# EAGLE board ELEKTRA-PMIC v0.2-35X22.86-0.8 (EAGLE 9.6.2)
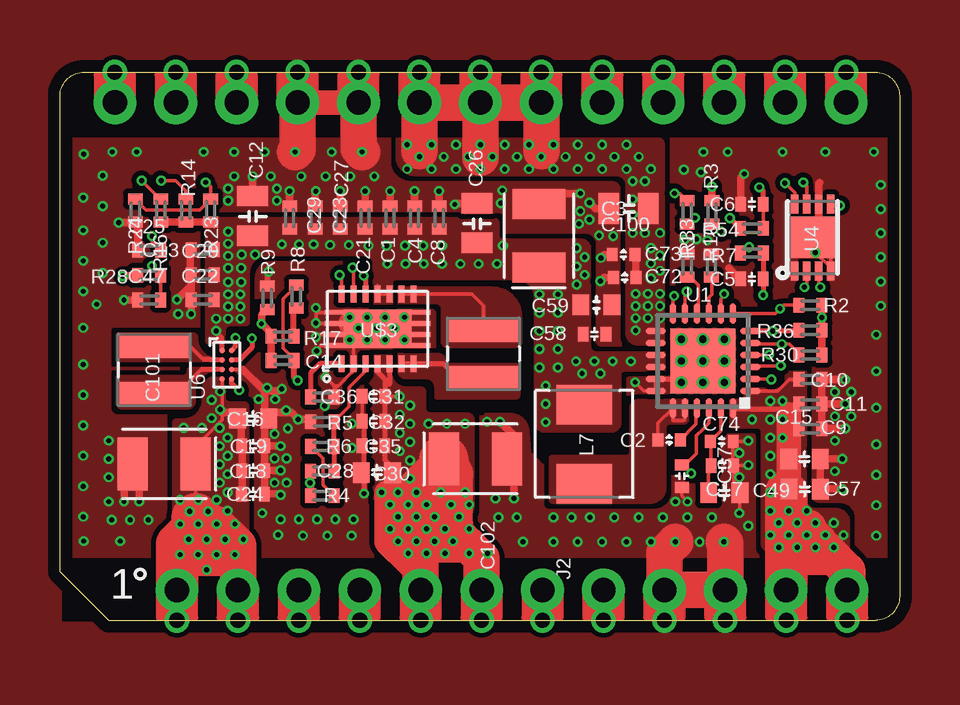
[diagram p0: board, top side]
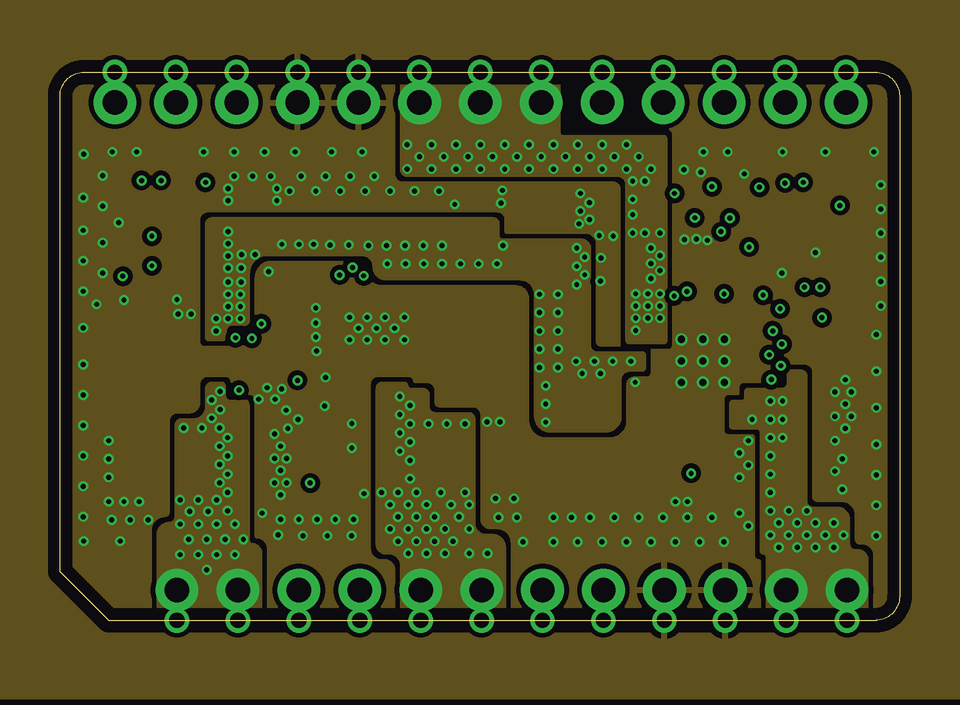
[diagram p1: board, inner layer Route2]
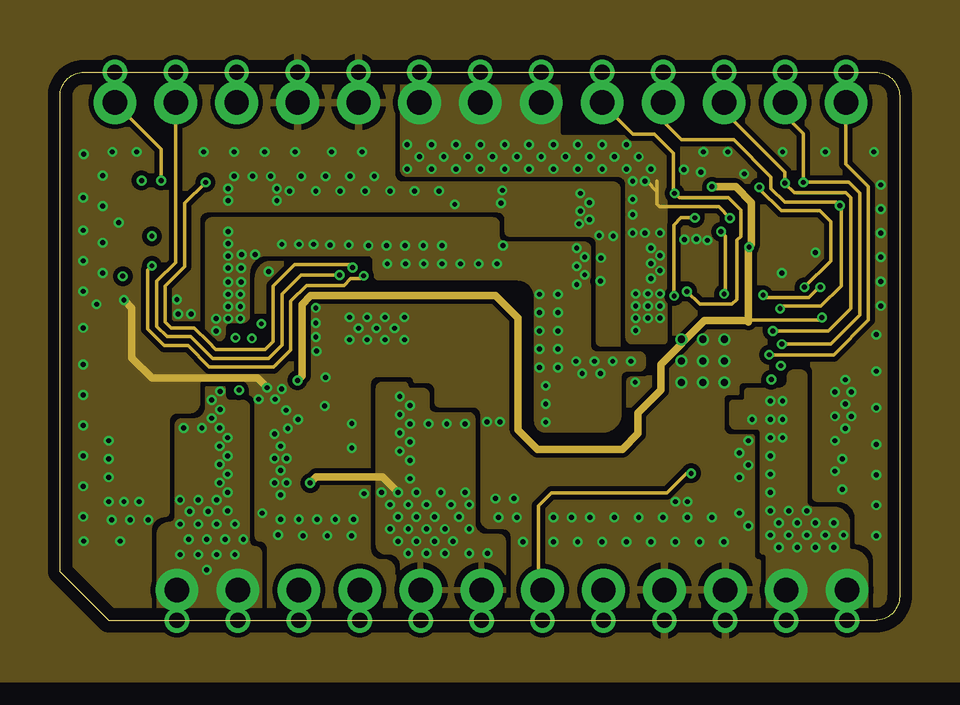
[diagram p2: board, inner layer Route15]
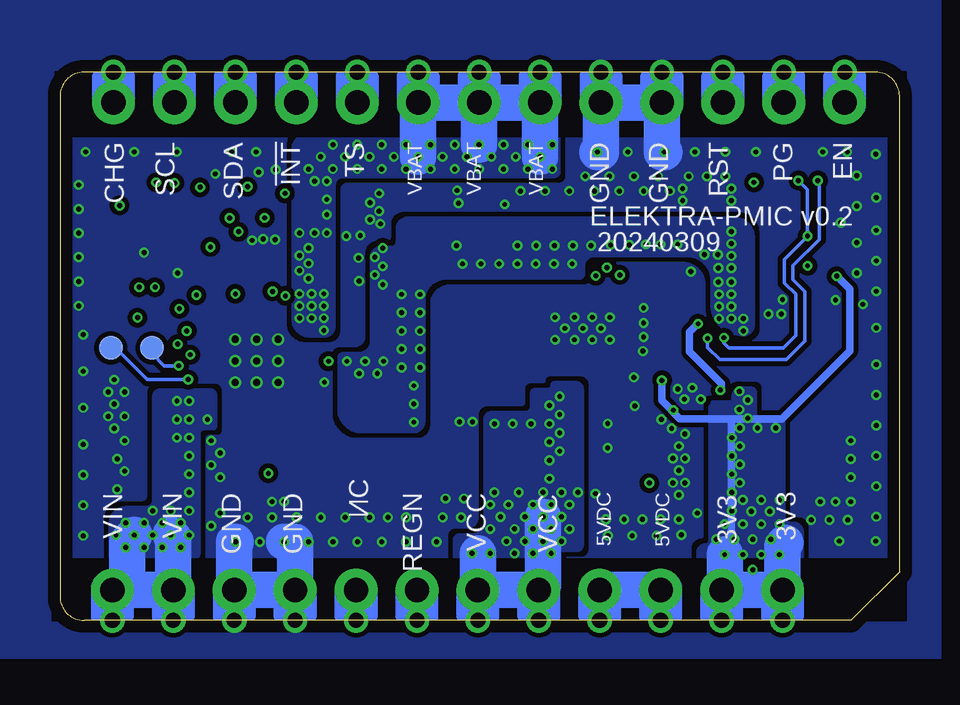
[diagram p3: board, bottom side, seen from below]

Size 35 x 22.86 mm. Coordinates in mm from the lower left corner, seen from the top.
Outline: 2.03,0 34,0 arc90 35,1 35,21.86 arc90 34,22.86 1,22.86 arc90 0,21.86 0,2.03 2.03,0
Copper layers (1+2*15+16): Top 0.035mm / dielectric 1.5mm / Route2 0.035mm / dielectric 0.15mm / Route15 0.035mm / dielectric 0.2mm / Bottom 0.035mm
Design rules "default *": minimum track width 4mil, minimum drill 8mil, track to track 8mil, track to pad 6mil, pad to pad 6mil, via to via 6mil, smd to smd 6mil, copper to edge 20mil, drill to drill 6mil, minimum pad ring 4mil, minimum via ring 4mil, stop-mask expansion 4mil, vias tented up to drill 16mil, thermal gap 10mil
Net classes: 0 default: width 0.152 mm, drill 0.203 mm, clearance 0.152 mm; 1 power: width 0.305 mm, drill 0.203 mm, clearance 0.203 mm; 3 BAT: drill 0.203 mm, clearance 0.203 mm; 4 3V3: width 0.305 mm, drill 0.203 mm, clearance 0.508 mm; 6 +3V3: width 0.203 mm, drill 0.203 mm, clearance 0.152 mm

## Footprints (pad centres in the part's own frame; a part is rotated, then mirrored left to right if it is on the bottom)
C0402_B = smd 0.457 x 0.61: 1 -0.483,0; 2 0.483,0
C-0402 = smd 0.45 x 0.55: 1 -0.47,0; 2 0.47,0
C0805 = smd 0.85 x 1.3: 1 -0.8,0; 2 0.85,0
C0402 = smd 0.45 x 0.6: 1 -0.47,0; 2 0.47,0
C-0603A = smd 0.7 x 0.85: 1 -0.65,0; 2 0.65,0
C0603 = smd 0.7 x 0.85: 1 -0.65,0; 2 0.65,0
CASE-B = smd 2.2 x 1.25: P$1 0,-1.32; P$2 0,1.32
1X13-CASTELLATED = drill 1.016 pad 1.778: 1 0,-15.24; 2 0,-12.7; 3 0,-10.16; 4 0,-7.62; 5 0,-5.08; 6 0,-2.54; 7 0,0; 8 0,2.54; 9 0,5.08; 10 0,7.62; 11 0,10.16; 12 0,12.7; 13 0,15.24 | drill 0.635 pad 1.016: @1 1.27,-15.24; @2 1.27,-12.7; @3 1.27,-10.16; @4 1.27,-7.62; @5 1.27,-5.08; @6 1.27,-2.54; @7 1.27,0; @8 1.27,2.54; @9 1.27,5.08; @10 1.27,7.62; @11 1.27,10.16; @12 1.27,12.7; @13 1.27,15.24
1X12-CASTELLATED = drill 1.016 pad 1.778: 1 0,-13.97; 2 0,-11.43; 3 0,-8.89; 4 0,-6.35; 5 0,-3.81; 6 0,-1.27; 7 0,1.27; 8 0,3.81; 9 0,6.35; 10 0,8.89; 11 0,11.43; 12 0,13.97 | drill 0.635 pad 1.016: @1 1.27,-13.97; @2 1.27,-11.43; @3 1.27,-8.89; @4 1.27,-6.35; @5 1.27,-3.81; @6 1.27,-1.27; @7 1.27,1.27; @8 1.27,3.81; @9 1.27,6.35; @10 1.27,8.89; @11 1.27,11.43; @12 1.27,13.97
INDUCTOR-VLS-E = smd 1 x 3: P$1 -1,0; P$2 1,0
INDUCTOR-4040 = smd 1.65 x 2.3: P$1 -1.65,0; P$2 1.65,0
R0402_B = smd 0.457 x 0.61: 1 -0.483,0; 2 0.483,0
TP = smd 1 x 1: P$1 0,0
TP0.4MM = smd 0.4 x 0.4: P$1 0,0
QFN24 = smd 0.85 x 0.28: 1 -1.975,1.25; 2 -1.975,0.75; 3 -1.975,0.25; 4 -1.975,-0.25; 5 -1.975,-0.75; 6 -1.975,-1.25; 13 1.975,-1.25; 14 1.975,-0.75; 15 1.975,-0.25; 16 1.975,0.25; 17 1.975,0.75; 18 1.975,1.25 | smd 0.28 x 0.85: 7 -1.25,-1.975; 8 -0.75,-1.975; 9 -0.25,-1.975; 10 0.25,-1.975; 11 0.75,-1.975; 12 1.25,-1.975; 19 1.25,1.975; 20 0.75,1.975; 21 0.25,1.975; 22 -0.25,1.975; 23 -0.75,1.975; 24 -1.25,1.975 | smd 2.7 x 2.7: PAD 0,0 | drill 0.3 pad 0.406: PAD@1 -0.9,0.9; PAD@2 0,0.9; PAD@3 0.9,0.9; PAD@4 -0.9,0; PAD@5 0,0; PAD@6 0.9,0; PAD@7 -0.9,-0.9; PAD@8 0,-0.9; PAD@9 0.9,-0.9
TDFN-8 = smd 0.8 x 0.3: 1 -1.4,0.75; 2 -1.4,0.25; 3 -1.4,-0.25; 4 -1.4,-0.75; 5 1.4,-0.75; 6 1.4,-0.25; 7 1.4,0.25; 8 1.4,0.75 | smd 1.73 x 1.88: EP 0,0
DSBGA = smd 0.23 x 0.23: A1 -0.2,0.6; A2 0.2,0.6; B1 -0.2,0.2; B2 0.2,0.2; C1 -0.2,-0.2; C2 0.2,-0.2; D1 -0.2,-0.6; D2 0.2,-0.6
TPS63020 = smd 0.25 x 0.7: 1 -1.5,-1.45; 2 -1,-1.45; 3 -0.5,-1.45; 4 0,-1.45; 5 0.5,-1.45; 6 1,-1.45; 7 1.5,-1.45; 8 1.5,1.45; 9 1,1.45; 10 0.5,1.45; 11 0,1.45; 12 -0.5,1.45; 13 -1,1.45; 14 -1.5,1.45 | smd 1.1 x 0.2: 15 -1.65,0.69; 16 -1.65,0.23; 17 -1.65,-0.23; 18 -1.65,-0.69; 19 1.65,-0.69; 20 1.65,-0.23; 21 1.65,0.23; 22 1.65,0.69 | smd 2.85 x 1.58: 23 0,0

## Placement (x,y rotation side)
C1  100pF  [C0402_B]  13.76,16.79 270 top
C2  47nF  [C-0402]  25.4,7.52 180 top
C3  10uF  [C0805]  23.72,17.17 180 top
C4  1000pF  [C0402_B]  14.79,16.79 270 top
C5  10nF  [C0402]  28.85,14.24 180 top
C6  1uF  [C0402]  28.85,17.36 180 top
C8  0.1nF  [C0402_B]  15.81,16.79 270 top
C9  0.1uF  [C0402_B]  31.28,7.99 180 top
C10  100pF  [C0402_B]  31.28,10.05 180 top
C11  1000pF  [C0402_B]  31.28,9.03 180 top
C12  22uF 10V  [C0805]  8.04,16.84 90 top
C13  100nF  [C0402_B]  5.94,15.45 0 top
C14  NC  [C0402_B]  9.29,10.84 0 top
C15  2.2uF,25V  [C-0603A]  31.04,6.73 0 top
C16  22uF  [C-0603A]  8.06,8.42 0 top
C17  0.1uF  [C0402]  27.61,6.46 180 top
C18  100pF  [C0402]  8.06,6.25 0 top
C19  1nF  [C0402]  8.06,7.28 0 top
C20  1000pF  [C0402_B]  5.94,14.41 0 top
C21  10pF  [C0402_B]  12.72,16.79 270 top
C22  10pF  [C0402_B]  5.94,13.37 0 top
C23  1000pF  [C0402_B]  10.64,16.79 270 top
C24  0.1uF  [C0402]  8.05,5.27 0 top
C25  10nF  [C0402_B]  3.72,15.44 0 top
C26  22uF 10V  [C0805]  17.38,16.54 90 top
C27  100nF  [C0402_B]  11.68,16.79 270 top
C28  NC  [C0402_B]  10.94,6.23 180 top
C29  10pF  [C0402_B]  9.58,16.79 270 top
C30  22uF  [C-0603A]  13.21,6.17 180 top
C31  1nF  [C0402]  13.07,9.34 180 top
C32  100pF  [C0402]  13.07,8.31 180 top
C35  0.1uF  [C0402]  13.07,7.28 180 top
C36  100nF  [C0402_B]  10.94,9.32 180 top
C37  4.7uF  [C0402]  25.93,6.02 270 top
C47  100nF  [C0402_B]  3.71,13.36 0 top
C49  10uF,25V  [C-0603A]  27.69,5.32 0 top
C57  10uF  [C-0603A]  31.04,5.47 0 top
C58  0.1uF  [C0402]  22.29,11.93 0 top
C59  22uF  [C0603]  22.36,13.15 0 top
C72  0.1uF  [C-0402]  23.54,14.3 180 top
C73  1000pF  [C-0402]  23.49,15.26 180 top
C74  1000p  [C-0402]  27.59,7.47 180 top
C100  220uF,10V  [CASE-B]  19.96,16.03 0 top
C101  220uF.6V  [CASE-B]  4.34,6.53 90 top
C102  220uF,6V  [CASE-B]  17.32,6.73 270 top
J1  M13PTH-CST-R  [1X13-CASTELLATED]  17.53,21.59 90 top
J2  M12PTH-CST-R  [1X12-CASTELLATED]  18.85,1.27 270 top
L1  2.2uH  [INDUCTOR-VLS-E]  3.94,10.45 270 top
L3  2.2uH  [INDUCTOR-VLS-E]  17.65,11.12 270 top
L7  2.2uH  [INDUCTOR-4040]  21.86,7.35 90 top
R1  0R  [R0402_B]  26.15,17.01 90 top
R2  10K  [R0402_B]  31.28,13.14 180 top
R3  10K  [R0402_B]  27.18,17.01 270 top
R4  1.1M  [R0402_B]  10.94,5.2 180 top
R5  180K  [R0402_B]  10.94,8.29 0 top
R6  62K  [R0402_B]  10.94,7.25 180 top
R7  150  [R0402_B]  28.85,15.31 0 top
R8  1M  [R0402_B]  9.85,13.5 90 top
R9  180K  [R0402_B]  8.64,13.45 270 top
R10  10K  [R0402_B]  27.15,14.79 270 top
R14  1M  [R0402_B]  5.25,17.09 90 top
R16  1M  [R0402_B]  4.21,17.09 90 top
R17  24K  [R0402_B]  9.29,11.85 0 top
R23  1M  [R0402_B]  6.28,17.09 90 top
R24  NC  [R0402_B]  3.14,17.09 270 top
R28  1M  [R0402_B]  3.71,14.38 180 top
R30  4K7  [R0402_B]  31.28,11.07 180 top
R33  160R  [R0402_B]  26.15,14.79 90 top
R36  4K7  [R0402_B]  31.28,12.09 180 top
R54  1K  [R0402_B]  28.85,16.34 0 top
TP1  TPTP  [TP]  32.88,11.37 0 bottom
TP2  TPTP  [TP]  31.16,11.37 0 bottom
TP3  TP0.4MM  [TP0.4MM]  25.91,11.72 0 bottom
TP4  TP0.4MM  [TP0.4MM]  26.82,11.73 270 bottom
TP5  TP0.4MM  [TP0.4MM]  27.7,11.72 270 bottom
TP6  TP0.4MM  [TP0.4MM]  25.91,10.82 270 bottom
TP7  TP0.4MM  [TP0.4MM]  25.9,9.93 270 bottom
TP8  TP0.4MM  [TP0.4MM]  26.79,10.82 270 bottom
TP9  TP0.4MM  [TP0.4MM]  26.78,9.93 270 bottom
TP10  TP0.4MM  [TP0.4MM]  27.73,10.83 270 bottom
TP11  TP0.4MM  [TP0.4MM]  27.72,9.92 270 bottom
TP12  TP0.4MM  [TP0.4MM]  13.55,12.64 270 bottom
TP13  TP0.4MM  [TP0.4MM]  14.36,12.64 270 bottom
TP14  TP0.4MM  [TP0.4MM]  12.08,12.64 270 bottom
TP15  TP0.4MM  [TP0.4MM]  12.07,11.7 270 bottom
TP16  TP0.4MM  [TP0.4MM]  12.81,12.64 270 bottom
TP17  TP0.4MM  [TP0.4MM]  12.81,11.7 90 bottom
TP18  TP0.4MM  [TP0.4MM]  14.35,11.7 90 bottom
TP19  TP0.4MM  [TP0.4MM]  13.54,11.7 90 bottom
U1  BQ24195L  [QFN24]  26.8,10.82 180 top
U4  MAX1704X  [TDFN-8]  31.38,15.96 90 top
U6  TPS631011  [DSBGA]  6.95,10.66 0 top
U$3  TPS63020  [TPS63020]  13.24,12.15 0 top

## Library data of the parts
C1 = Particle; ITEM_NAME: CAP CER 100pF 50V X7R 0402 10%; ITEM_NUMBER: PT-200138
C2 = particle SZ; ITEM_NAME: CAP CER 0.1uF 16V X7R 0402 10%; ITEM_NUMBER: PT-200005
C3 C37 C58 C59 = particle SZ; ITEM_NAME: CAP CER 10uF 6.3V X5R 0603 10% Low ESR<70mohms; ITEM_NUMBER: PT-200209
C4 C20 C23 = Particle; ITEM_NAME: CAP CER 1000PF 50V X7R 0402 10%
C5 = particle SZ; ITEM_NAME: CAP CER 10nF 16V X5R 0402 10%; ITEM_NUMBER: PT-200136
C6 = particle SZ; ITEM_NAME: CAP CER X5R 1uF 0402 10V ±10% ROHS; ITEM_NUMBER: PT-200695
C8 C13 C27 = Particle; ITEM_NAME: CAP CER 0.1UF 16V X7R 0402 10%; ITEM_NUMBER: PT-200649
C9 = Particle; ITEM_NAME: CAP CER 0.1UF 25V X7R 0402 20%; ITEM_NUMBER: PT-200690
C10 = Particle; ITEM_NAME: CAP CER 100PF 1% 50V C0G/NP0 0402; ITEM_NUMBER: 120-00051
C11 = Particle; ITEM_NAME: CAP CER 1000PF 50V X7R 0402 10%; ITEM_NUMBER: PT-200631
C12 C26 = particle SZ; ITEM_NAME: CAP CER 0.1UF 16V X7R 0402 10%; ITEM_NUMBER: 120-00060
C14 C25 C28 C36 C47 J1 J2 L1 L3 R7 R33 = Particle
C15 C49 C57 = particle SZ; ITEM_NAME: CAP CER 100PF 50V C0G/NP0 0603 5%; ITEM_NUMBER: PT-200458
C16 C30 = particle SZ; ITEM_NAME: CAP CER 22UF 10V X5R 0603 20%; ITEM_NUMBER: 120-00061
C17 = RedBear; ITEM_NAME: CAP CER 0.1UF 25V X7R 0402 20%; ITEM_NUMBER: PT-200690
C18 C32 = particle SZ; ITEM_NAME: 100pF 50V X7R 0402 10%; ITEM_NUMBER: PT-200138
C19 C31 C73 = particle SZ; ITEM_NAME: 1000PF 50V X7R 0402 10%; ITEM_NUMBER: PT-200631
C21 C22 C29 = Particle; ITEM_NAME: CAP CER 10PF 5% 50V C0G/NP0 0402; ITEM_NUMBER: 120-00038
C24 C35 = particle SZ; ITEM_NAME: 0.1UF 16V X7R 0402 10%; ITEM_NUMBER: PT-200649
C72 = particle SZ; ITEM_NAME: CAP CER 0.1UF 16V X7R 0402 10%; ITEM_NUMBER: PT-200649
C74 = particle SZ; ITEM_NAME: CAP CER 1000PF 50V X7R 0402 10%; ITEM_NUMBER: PT-200631
C100-C102 TP1-TP19 U6 U$3 = particle SZ
L7 = Particle; ITEM_NAME: FIXED IND 1UH 5.8A 26 MOHM SMD 4020; ITEM_NUMBER: 155-00005
R1 = Spark; ITEM_NAME: RES SMD 0R OHM 5% 1/16W 0402; ITEM_NUMBER: PT-200624
R2 R3 R10 = Spark; ITEM_NAME: 10K OHM 5% 1/16W 0402; ITEM_NUMBER: PT-200004
R4-R6 R9 R24 R28 = Spark
R8 R14 R16 R23 = Spark; ITEM_NAME: RES SMD 1M OHM 1% 1/16W 0402; ITEM_NUMBER: PT-201084
R17 = Spark; ITEM_NAME: RES SMD 24K OHM 1% 1/16W 0402; ITEM_NUMBER: PT-201025
R30 R36 = Particle; ITEM_NAME: RES SMD 4K7 OHM 5% 1/16W 0402; ITEM_NUMBER: PT-200230
R54 = Particle; ITEM_NAME: RES SMD 1K OHM 5% 1/16W 0402; ITEM_NUMBER: PT-200002
U1 = electron; ITEM_NAME: IC BATT CHG LI-ION 1CELL 24VQFN 2.5A CHG CURRENT; ITEM_NUMBER: 150-00013
U4 = SparkFun-PowerIC; ITEM_NAME: IC 2-WIRE FG MODEL GAUGE LO BATT; ITEM_NUMBER: PT-200141

## Nets
3V3: C14.2 C16.1 C18.1 C19.1 C24.1 C101.P$1 J2.1 J2.2 J2.@1 J2.@2 R2.1 R3.1 R7.1 R8.2 R28.2 R30.1 R36.1 U6.D1
5VDC: J2.3 J2.4 J2.@3 J2.@4
!CE: R10.2 U1.9
!FUEL-INT: J1.4 J1.@4 R2.2 U1.7 U4.5
!RST: J1.11 J1.@11
BTST: C2.1 U1.21
CHG: J1.1 J1.@1 U1.4
ENABLE: C25.2 J1.13 J1.@13 R14.2 U6.A2
GND: C1.1 C3.2 C4.1 C5.2 C6.2 C8.1 C9.1 C10.1 C11.1 C12.2 C13.1 C15.2 C16.2 C17.1 C18.2 C19.2 C20.1 C21.1 C22.1 C23.1 C24.2 C25.1 C26.2 C27.1 C29.1 C30.2 C31.2 C32.2 C35.2 C36.1 C37.2 C47.1 C49.2 C57.2 C58.2 C59.2 C72.2 C73.2 C74.1 C100.P$2 C101.P$2 C102.P$2 J1.9 J1.10 J1.@9 J1.@10 J2.9 J2.10 J2.@9 J2.@10 R5.1 R9.1 R10.1 R24.2 R33.2 TP3.P$1 TP4.P$1 TP5.P$1 TP6.P$1 TP7.P$1 TP8.P$1 TP9.P$1 TP10.P$1 TP11.P$1 TP12.P$1 TP13.P$1 TP14.P$1 TP15.P$1 TP16.P$1 TP17.P$1 TP18.P$1 TP19.P$1 U1.17 U1.18 U1.PAD U1.PAD@1 U1.PAD@2 U1.PAD@3 U1.PAD@4 U1.PAD@5 U1.PAD@6 U1.PAD@7 U1.PAD@8 U1.PAD@9 U4.1 U4.4 U4.6 U4.EP U6.C2 U$3.2 U$3.15 U$3.16 U$3.17 U$3.18 U$3.19 U$3.20 U$3.21 U$3.22 U$3.23
ILIM: R33.1 U1.10
N$1: R1.1 U1.12
N$2: C17.2 C49.1 C74.2 U1.23
N$4: TP2.P$1 U1.3
N$5: C14.1 R9.2 R17.1 U6.D2
N$6: C28.1 R5.2 R6.1 U$3.3
N$7: TP1.P$1 U1.2
N$8: R8.1 R17.2
N$9: R4.1 R6.2
N$11: L3.P$1 U$3.8 U$3.9
N$12: L1.P$1 U6.B1
N$15: R16.2 U6.B2
N$16: L3.P$2 U$3.6 U$3.7
N$17: L1.P$2 U6.C1
N$19: C36.2 U$3.1
N$21: C47.2 R28.1 U$3.12
N$22: R23.2 R24.1 U$3.13
N$48: C5.1 R7.2 U4.3
N$49: C6.1 R54.2 U4.2
OTG: R3.2 U1.8
PG: J1.12 J1.@12 U$3.14
REGN: C37.1 J2.7 J2.@7 U1.22
SCL: J1.2 J1.@2 R30.2 U1.5 U4.7
SDA: J1.3 J1.@3 R36.2 U1.6 U4.8
SW1: C2.2 L7.P$1 U1.19 U1.20
TS: J1.5 J1.@5 R1.2 U1.11
VBAT: C3.1 C72.1 C73.1 J1.6 J1.7 J1.8 J1.@6 J1.@7 J1.@8 R54.1 U1.13 U1.14
VCC: C28.2 C30.1 C31.1 C32.1 C35.1 C102.P$1 J2.5 J2.6 J2.@5 J2.@6 R4.2 U$3.4 U$3.5
VIN: C9.2 C10.2 C11.2 C15.1 C57.1 J2.11 J2.12 J2.@11 J2.@12 U1.1 U1.24
VSYS: C1.2 C4.2 C8.2 C12.1 C13.2 C20.2 C21.2 C22.2 C23.2 C26.1 C27.2 C29.2 C58.1 C59.1 C100.P$1 L7.P$2 R14.1 R16.1 R23.1 U1.15 U1.16 U6.A1 U$3.10 U$3.11

## Tracks (layer width: path | path; a pad name or v marks a point on that pad's centre or on a via)
3V3  (via drill 0.2 pad 0.41)
  Top 0.152: U6.D1 6.75,8.66 6.75,8.36 5.82,7.42 | R30.1 31.86,10.97 | 2.65,14.38 v2.62,14.35 | R8.2 9.86,13.95 9.3,13.39 9.3,11.36 9.77,10.89 C14.2 | C101.P$1 5.66,4.29 | v5,2.74 5,3.02 v5.36,3.38 | v5.77,2.74 5.77,3.02 v6.12,3.38 | v6.53,2.74 6.53,3.02 v6.88,3.38
  Top 0.203: R36.1 R30.1 | R7.1 28.62,15.57 v28.73,15.57
  Top 0.254: C14.2 9.74,10.81 9.74,10.17 v9.91,10.01
  Top 0.305: R30.1 31.77,11.81 | R3.1 v27.18,18.08 v27.18,18.09 | C24.1 C18.1 C19.1 7.54,7.32 7.54,8.28 C16.1 7.16,8.66 6.75,8.66 | R2.1 v31.77,12.62 R36.1 | R28.2 2.65,14.38
  Top 0.508: J2.1 J2.@1 4.88,2.27 5.2,2.6 | J2.@2 7.42,1.63 7.37,1.68
  Top 1.524: 5.2,2.6 7.37,2.6 | J2.2 7.42,3.12 v6.53,4.01
  Top 1.778: 5.84,4.17 4.88,3.2 4.88,1.4
  Top 2.032: 5.66,4.29 5.84,4.12 | 5.84,3.91 5.84,4.12 | 5.84,4.12 5.84,4.17
  Route15 0.152: v31.77,12.62 31.66,12.52 28.79,12.52 28.7,12.6
  Route15 0.305: 28.7,12.45 28.7,12.5 | 28.7,12.5 28.7,12.6 28.7,15.54 v28.73,15.57 28.83,15.67 28.83,17.42 28.17,18.09 v27.18,18.09 | 28.7,12.5 26.87,12.5 25.04,10.67 25.04,9.6 24.09,8.65 24.09,7.79 23.44,7.14 19.91,7.14 19.1,7.95 19.1,12.6 18.16,13.54 10.46,13.54 10.1,13.18 10.1,10.2 v9.91,10.01
  Bottom 0.152: 7.01,5.18 7.01,5.13 | v9.91,10.01 9.96,9.96
  Bottom 0.203: J2.1 4.88,1.03 5.29,0.61 5.29,0.86 J2.1
  Bottom 0.305: v2.62,14.35 2.08,13.82 2.08,11.23 4.9,8.41 7.01,8.41 | v9.91,10.01 9.91,9.16 9.15,8.41 7.01,8.41 | 7.01,8.41 7.01,5.18 7.01,3.66 | 7.01,3.66 7.01,1.68 J2.2 | 7.04,3.68 7.01,3.66
  Bottom 0.508: J2.@1 J2.1 | J2.@2 J2.2
  Bottom 1.524: 4.75,3.24 4.88,3.12 J2.1 J2.2 7.29,1.4 v7.29,2.74
  other vias: 5,5.03 5.77,5.03 6.53,5.03 5.41,4.55 6.17,4.55 5,4.01 5.77,4.01 6.68,9.55 6.68,8.79 6.65,8.03 6.32,9.19 6.32,8.43 5.92,8.03 5.16,8.03 6.65,7.26 6.65,6.5 6.65,5.74 6.99,7.62 6.99,6.86 6.99,6.1 6.99,5.33 6.99,4.57 7.29,4.01 7.65,3.38 6.12,2.11
  pour Top (no thermals): 6.86,10.19 6.55,10.19 arc90 5.96,9.59 5.96,9.2 arc-90 5.14,8.38 4.88,8.38 arc90 4.72,8.23 4.72,3.3 7.67,3.3 arc90 7.85,3.48 7.85,8.89 arc90 7.65,9.09 7.04,9.09 arc-90 6.86,9.27
  pour Route15 (no thermals): 6.1,9.65 6.1,8.89 arc-90 5.59,8.38 5.08,8.38 arc90 4.83,8.13 4.83,4.83 4.83,4.32 arc-90 4.57,4.06 arc90 4.06,3.56 4.06,0 8.13,0 arc90 8.38,0.25 8.38,2.54 8.38,2.79 arc90 8.13,3.05 arc-90 7.87,3.3 7.87,8.13 7.87,8.64 7.87,8.89 arc90 7.62,9.14 7.11,9.14 arc-90 6.86,9.4 6.86,9.65 arc90 6.6,9.91 6.35,9.91 arc90
  pour Route2 (no thermals): 6.48,9.91 6.73,9.91 arc-90 6.86,9.78 6.86,9.4 arc90 7.11,9.14 7.75,9.14 arc-90 7.87,9.02 7.87,3.3 arc90 8,3.17 arc-90 8.38,2.79 8.38,0.64 8.38,0.51 4.19,0.51 arc-90 4.06,0.64 4.06,3.56 arc-90 4.57,4.06 arc90 4.83,4.32 4.83,7.87 4.83,8.13 arc-90 5.08,8.38 5.59,8.38 arc90 6.1,8.89 6.1,9.65 arc-90 6.35,9.91
  pour Bottom (no thermals): 6.2,9.7 6.6,9.7 arc-90 6.96,9.35 6.96,9.22 arc90 7.06,9.12 7.77,9.12 arc-90 7.92,8.97 7.92,3.3 arc90 8.05,3.17 arc-90 8.43,2.79 8.43,2.54 4.06,2.54 arc-90 4.04,2.57 4.04,3.53 4.04,3.71 arc-90 4.39,4.06 4.5,4.06 arc90 4.8,4.37 4.8,8.23 arc-90 4.9,8.33 5.61,8.33 arc90 5.99,8.71 5.99,9.5 arc-90
5VDC
  Top 0.508: J2.@3 J2.3 | J2.@4 J2.4
  Bottom 0.508: 12.19,1.27 J2.4
  Bottom 1.524: J2.3 12.19,1.27
!CE
  Top 0.152: R10.2 27.18,14.29 27.18,13.58 27.05,13.46 U1.9
!FUEL-INT  (via drill 0.2 pad 0.41)
  Top 0.152: v32.51,17.3 32.19,17.3 U4.5 | U1.7 29.82,12.79 v30.02,13 30.17,13.14 R2.2
  Top 0.508: J1.@4 J1.4
  Route15 0.152: J1.4 25.15,20.8 25.91,20.04 28.09,20.04 29.64,18.49 29.64,18.01 30.21,17.44 32.37,17.44 v32.51,17.3 32.56,17.25 32.56,13.95 31.73,13.11 30.14,13.11 v30.03,12.99 v30.02,13
!RST
  Top 0.508: J1.@11 J1.11
  Bottom 0.152: 7.37,22.27 J1.11
BTST
  Top 0.152: U1.21 26.52,8.81 26.52,8.19 26.18,7.86 26.18,7.83 C2.1
CHG  (via drill 0.2 pad 0.41)
  Top 0.152: v29.57,11.07 v29.56,11.07 U1.4
  Top 0.508: J1.@1 J1.1
  Route15 0.152: v29.57,11.07 32.27,11.07 33.71,12.52 33.71,18.08 32.77,19.02 J1.1 J1.@1 | 32.77,22 32.77,22.27
  Route15 0.203: 32.77,22 J1.1
  Bottom 0.152: J1.@1 32.77,22.25
  Bottom 0.203: 32.77,22.25 32.77,22
ENABLE  (via drill 0.2 pad 0.41)
  Top 0.152: R14.2 5.25,17.92 4.83,18.34 v4.22,18.34 | C25.2 3.83,15.8 v3.83,16.02
  Top 0.203: U6.A2 7.31,11.42 v7.31,11.78 v7.32,11.79
  Top 0.508: J1.@13 J1.13
  Route15 0.152: v4.22,18.34 4.22,19.66 J1.13
  Bottom 0.152: J1.13 2.29,22.27 | v4.22,18.34 3.83,17.96 v3.83,16.02 3.83,16 4.8,15.04 4.8,14.07 4.33,13.6 4.33,11.88 4.84,11.36 7.12,11.36 7.32,11.56 v7.32,11.79
GND  (via drill 0.2 pad 0.41)
  Top 0.152: 14.37,12.05 14.71,12.38 U$3.21 14.62,12.38 TP13.P$1 14.56,12.84 U$3.22 14.77,12.84 | 14.37,12.05 13.85,11.52 | U$3.23 13.58,12.15 | U$3.23 13.57,11.57 | 14.7,11.92 U$3.20 14.49,11.92 14.37,12.05 | C17.1 28.06,6.48 C74.1 28.68,7.47 v28.7,7.49 | C17.1 28.08,5.58 C49.2 28.34,4.49 v28.32,4.47 | v31.5,15.34 32.12,14.71 U4.4 32.12,15.47 32.11,15.49 | C17.1 28.68,6.46 v28.7,6.48 | U6.C2 7.62,10.46 | 12.68,7.24 12.56,7.24 C35.2 | U$3.15 11.05,12.84 | U$3.18 11.86,11.46 12.07,11.68 TP15.P$1 11.85,11.92 U$3.17 | v12.45,12.18 12.25,12.38 12.12,12.38 U$3.16 10.67,12.38 v10.67,13.03 | U$3.15 12.61,12.84 TP16.P$1 | U1.17 U1.18 24.34,9.57 v23.98,9.93 | C20.1 C22.1 5.46,13.23 v5.46,12.78 | C31.2 12.6,8.24 | C59.2 22.86,13.19 | 23.04,13.19 C59.2 | C59.2 22.96,13.12 | C59.2 23.21,12.95 | C37.2 25.93,5.19 v26.16,4.95 | 9.91,21.64 9.91,22.27 | U$3.19 14.6,11.46 v14.36,11.7 | U$3.15 11.87,12.84 v12.07,12.64 | U$3.17 12.3,11.92 12.29,11.92 | 12.29,11.92 12.37,11.92 | 12.37,11.92 12.59,11.92 TP17.P$1 12.57,11.46 U$3.18 | U$3.23 12.6,12.15 12.37,11.92 | U$3.2 12.24,11.87 | 12.22,11.85 12.24,11.87 | 12.24,11.87 12.29,11.92 | 12.22,10.45 12.22,10.4 11.6,9.78 | 11.6,9.78 11.42,9.6 C36.1 11.42,9.79 v11.07,10.13 11.43,9.78 11.6,9.78 | 8.53,8.53 8.53,8.25 | v10.67,12.39 10.67,12.84 U$3.15 | U$3.17 10.78,11.92 v10.67,11.81 | U$3.18 10.89,11.46 10.69,11.27 v10.69,11.23
  Top 0.203: 12.22,10.45 12.24,10.47 U$3.2 | U1.17 27.28,10.07 | C36.1 v11.05,8.94 v11.04,8.94 | 12.68,7.24 12.68,8.24 C32.2 12.6,8.24 12.57,8.2 v12.17,8.2 | C35.2 12.65,7.23 12.65,7.22 | 12.65,7.22 12.61,7.19 v12.17,7.19 | 12.65,7.22 12.65,5.31 v12.68,5.28 12.68,6.05 C30.2
  Top 0.254: v8.69,14.55 8.64,14.49 R9.1
  Top 0.305: C6.2 28.38,17.25 | 28.35,17.38 C6.2 | 31.67,18.26 31.63,18.22 U4.6 31.62,16.51 31.83,16.31 31.48,15.96 U4.EP | C6.2 28.38,18.47 v28.52,18.62 | C5.2 28.33,14.24 27.89,14.68 | C3.2 22.32,17.17 v22.07,17.42 | v21.69,17.8 20.42,17.8 C100.P$2 | v22.55,15.11 22.7,15.26 C73.2 | v22.53,14.15 22.68,14.3 C72.2 | v2.67,4.95 2.67,5.71 3.02,6.07 C101.P$2 3.3,6.25 v3.3,4.95 | C19.2 9.18,7.28 v9.2,7.26 | C18.2 v9.19,6.25 v9.2,6.25 | v9.2,5.23 9.16,5.27 C24.2 C18.2 | C19.2 8.53,8.25 8.7,8.42 C16.2 8.71,8.55 8.81,8.66 9.65,8.66 v9.93,8.38 10.36,8.38 R5.1 | C19.2 C18.2 | C11.1 C10.1 32.73,10.05 v32.74,10.03 | C11.1 v32.73,9.03 v32.74,9.02 | C11.1 C9.1 v32.74,8 | C15.2 31.75,6.73 | 31.75,6.73 v32.61,6.73 | 31.75,6.73 31.69,6.67 C57.2 32.6,5.47 v32.61,5.46 | U4.1 30.54,14.48 v30.1,14.48 | v18.92,5.08 18.92,6.45 C102.P$2 18.9,6.99 18.9,7.72 v18.34,8.28 | C12.2 8.04,18.51 v8.03,18.52 | C29.1 v9.58,17.91 | C23.1 10.64,17.88 v10.67,17.91 | C27.1 v11.68,17.91 | C21.1 12.72,17.9 v12.72,17.91 | C1.1 13.76,17.9 v13.77,17.91 | C4.1 v14.79,17.91 v14.78,17.91 | C8.1 15.81,17.9 v15.8,17.91 | v16.46,17.35 16.5,17.39 C26.2 | C47.1 v2.67,13.36 | C20.1 5.42,14.45 5.42,15.41 C13.1 | C20.1 5.46,13.23 | v5.46,12.78 C22.1 5.45,13.35 | C20.1 5.46,13.96 v4.88,13.38 | R24.2 3.12,16.59 | 3.12,16.59 v2.45,16.59 | C25.1 3.24,16.47 3.12,16.59 | 7.62,10.46 8.53,9.56 | 8.53,8.53 8.53,9.56 | 8.53,9.56 9.15,9.56 v9.25,9.65
  Top 0.381: v18.34,8.28 18.36,8.28
  Top 0.508: J2.@9 J2.9 | J2.@10 J2.10 | J1.10 9.91,21.64 J1.@10 | J1.@9 J1.9
  Top 1.016: U$3.23 12.35,12.15 12.12,12.38 | J1.10 J1.9
  Top 1.524: J1.10 9.91,19.63 v9.8,19.53 | J1.9 12.45,19.68 v12.6,19.53 | v25.65,3.28 25.2,2.83 J2.9 J2.10 27.74,3.22 v27.68,3.28
  Route15 0.305: v8.64,9.7 8.23,10.11 3.83,10.11 3,10.95 3,13.03 v2.67,13.36
  Bottom 1.524: v25.65,3.28 25.2,3.28 J2.9 J2.10 27.74,3.28 v27.68,3.28 | v12.6,19.53 12.45,19.53 J1.9 J1.10 9.91,19.53 v9.8,19.53
  other vias: 12.81,12.64 13.54,12.64 14.36,12.64 13.19,12.18 13.95,12.18 12.07,11.7 12.81,11.7 13.54,11.7 0.99,19.44 0.97,17.63 0.97,10.67 0.97,9.4 0.97,8.13 0.97,6.86 0.97,5.59 0.97,4.32 0.99,3.31 34.22,17.15 34.22,16.15 34.22,15.15 26.72,18.69 2.18,19.53 3.2,19.53 5.99,19.53 7.26,19.53 8.53,19.53 11.33,19.53 26.82,19.53 27.84,19.53 30.12,19.53 31.9,19.53 33.93,19.53 0.97,12.2 0.97,13.72 0.97,14.99 0.97,16.26 2.51,3.31 9.09,3.56 10.13,3.53 11.15,3.53 12.16,3.53 20.57,3.28 21.58,3.28 22.6,3.28 23.62,3.28 24.63,3.28 26.66,3.28 19.3,3.28 34.03,3.53 34.03,4.8 34.03,6.07 34.03,7.34 34.03,8.86 34.03,10.39 34.03,11.91 34.22,14.13 34.22,13.11 34.22,18.16 8.79,18.52 7.26,18.52 10.06,18.52 11.07,18.52 12.09,18.52 13.11,18.52 7.01,18.01 7.01,17.5 9.04,18.01 9.04,17.5 2.03,7.49 2.03,6.73 2.03,5.97 2.03,4.95 8.94,6.76 8.94,5.74 8.94,7.77 9.5,8 9.45,6.76 9.45,5.74 8.43,4.47 9.19,4.22 9.96,4.22 10.72,4.22 11.48,4.22 12.24,4.22 2.16,4.19 2.92,4.19 3.68,4.19 17.81,8.28 18.16,5.08 25.65,4.95 28.32,6.99 28.32,5.97 28.7,3.94 27.17,4.29 26.16,4.29 25.14,4.29 32.31,9.53 32.31,8.51 32.31,7.49 32.31,6.22 26.01,18.8 22.48,16.05 23.06,16.03 22.07,16.71 21.69,17.07 18.44,17.93 1.78,18.54 1.78,17.27 1.78,15.75 1.78,14.48 1.52,13.18 32.99,9.53 32.99,8.51 8.28,9.22 8.97,9.22 21.64,16.54 18.39,17.4 24.12,4.29 23.11,4.29 22.09,4.29 21.33,4.29 20.57,4.29 18.28,4.29 19.04,4.29 4.93,12.78 26.03,15.88 26.53,15.9 26.99,15.85 9.42,8.76
  pour Bottom (rank 3, no thermals): -1.7,29.34 47.42,29.34 47.42,-1.55 -1.7,-1.55
  pour Top (rank 3, no thermals): -2.71,31.57 42.57,31.57 42.57,-4.98 -2.71,-4.98
  pour Route2 (rank 4): -3.89,30.63 44.27,30.63 44.27,-3.23 -3.89,-3.23
  pour Route15 (rank 3): -3,29.97 45.82,29.97 45.82,-2.44 -3,-2.44
  pour Bottom (no thermals): 11.8,13.1 14.59,13.1 arc-90 14.88,12.8 14.88,11.4 arc-90 14.76,11.28 11.56,11.28 arc-90 11.4,11.43 11.4,12.85 arc-90
  pour Bottom (no thermals): 25.98,12.19 27.84,12.19 arc-90 28.22,11.81 28.22,9.93 arc-90 27.74,9.45 25.91,9.45 arc-90 25.45,9.91 25.45,11.66 arc-90
  cutout Top: 17.63,8.61 arc-90 17.73,8.71 18.77,8.71 arc-90 19.64,7.85 19.7,7.02 20.14,6.58 20.14,7.57 arc-90 19.96,7.75 19.96,7.85 arc-90 19.74,8.08 19.74,8.94 17.4,8.94 17.4,8.61
  cutout Top: 0.13,2.54 0.13,0 34.67,0 34.67,2.54
  cutout Top: 1.4,22.86 0,22.86 0,20.45 0,20.32 0,20.19 34.92,20.19 34.92,22.86 34.16,22.86
  cutout Bottom: -0.25,22.86 -0.25,20.19 35.18,20.19 35.18,22.86
  cutout Bottom: -0.25,2.54 -0.25,0 35.31,0 35.31,2.54
ILIM
  Top 0.152: R33.1 26.28,14.31 26.6,13.99 26.6,12.85 U1.10
N$1  (via drill 0.2 pad 0.41)
  Top 0.152: 26.04,16.53 R1.1 26.21,16.53 v26.47,16.79 | U1.12 25.55,13.48 v25.6,13.53
  Route15 0.152: v25.6,13.53 v25.59,13.54 25.59,16.49 25.89,16.79 v26.47,16.79
N$2
  Top 0.152: U1.23 27.55,7.9 C74.2 27.14,7.44 C17.2 27.04,6.35 C49.1
N$4  (via drill 0.2 pad 0.41)
  Top 0.152: v30.05,10.62 29,10.62 28.96,10.57 U1.3
  Bottom 0.152: TP2.P$1 31.16,11.13 30.65,10.62 v30.05,10.62
N$5  (via drill 0.2 pad 0.41)
  Top 0.152: 8.8,10.98 C14.1
  Top 0.203: v7.47,9.6 7.44,9.6 7.16,9.88 U6.D2
  Top 0.254: R17.1 8.8,11.95 | R9.2 8.6,12.93
  Top 0.305: 8.83,10.86 C14.1 R17.1 8.8,11.97 v8.41,12.37 v8.4,12.37 8.4,12.72 R9.2 8.59,12.92
  Bottom 0.305: v7.47,9.6 7.42,9.65 7.42,9.88 8.75,11.22 8.75,12.01 v8.4,12.37
N$6
  Top 0.152: R5.2 12.04,8.91 12.04,9.7 12.74,10.4 U$3.3
  Top 0.203: C28.1 R6.1 R5.2
N$7  (via drill 0.2 pad 0.41)
  Top 0.152: U1.2 29.63,10.07 v29.65,10.04
  Bottom 0.152: TP1.P$1 32.68,11.37 31.36,10.05 v29.65,10.05 v29.65,10.04
N$8
  Top 0.254: R17.2 9.73,11.89 9.73,12.89 R8.1
N$9
  Top 0.152: R6.2 10.96,6.74 10.96,5.66 R4.1
N$11
  Top 0.152: U$3.9 U$3.8 17.18,13.6 17.65,13.13 L3.P$1
  pour Top (no thermals): 14.1,13.87 18.03,13.87 arc-90 19.23,12.67 19.23,11.66 arc-90 18.97,11.4 16.15,11.4 arc-90 15.93,11.63 15.93,13 arc90 15.7,13.23 14.1,13.23
N$12
  Top 0.152: 6.3,10.87 6.25,10.92 5.95,10.92 5.42,11.45 5.4,11.45 | L1.P$1 5.4,11.45 | U6.B1 5.99,10.86 5.4,11.45
  Top 0.203: U6.B1 6.3,10.87
  pour Top (no thermals): 2.46,11.96 5.54,11.96 arc-90 5.71,11.79 5.71,11.76 arc90 6.57,10.9 6.76,10.9 6.76,10.82 2.39,10.82 2.39,11.89 arc-90
N$15  (via drill 0.2 pad 0.41)
  Top 0.152: R16.2 4.17,17.57 v3.4,18.34 | U6.B2
  Top 0.203: v8,11.76 8,11.38 7.48,10.86 U6.B2
  Bottom 0.152: v8,11.76 8,11.38 7.49,10.87 4.72,10.87 3.94,11.65 3.94,13.72 4.44,14.22 4.44,14.79 3.35,15.88 3.35,18.29 v3.4,18.34
N$16
  Top 0.203: 16.64,10.16 16.53,10.16 15.99,10.7 U$3.7 U$3.6
  pour Top (no thermals): 14.12,11.1 15.77,11.1 arc-90 16.03,10.85 arc90 16.18,10.69 18.95,10.69 arc-90 19.15,10.49 19.15,9.42 arc-90 18.97,9.25 15.75,9.25 arc-90 15.65,9.35 15.65,9.7 arc90 15.24,10.11 14.4,10.11 arc-90 14.12,10.39
N$17
  Top 0.152: 5.89,10.46 4.88,9.45 L1.P$2
  Top 0.203: U6.C1 5.89,10.46
  pour Top (no thermals): 2.39,10.16 2.39,9.04 arc90 2.59,8.84 5.31,8.84 arc90 5.61,9.14 5.61,9.52 arc-90 6.51,10.41 6.79,10.41 6.79,10.52 5.46,10.52 arc90 5.33,10.39 arc-90 5.13,10.19 2.41,10.19 arc90
N$19
  Top 0.203: U$3.1 10.84,10.7 10.46,10.31 C36.2
N$21  (via drill 0.2, 0.2 pad 0.41)
  Top 0.152: v3.83,14.78 4.22,14.4 4.33,14.51 4.32,14.51 R28.1 C47.2
  Top 0.203: v12.66,14.37 12.74,14.29 U$3.12
  Route15 0.152: v3.83,14.78 3.66,14.6 3.66,12.14 4.34,11.46 5.33,11.46 6.22,10.57 8.9,10.57 9.62,11.28 9.62,13.31 10.28,13.97 11.84,13.97 12.12,14.25 12.55,14.25 v12.66,14.37
N$22  (via drill 0.2 pad 0.41)
  Top 0.152: v12.2,14.71 12.24,14.67 12.24,14.55 12.23,14.54 12.23,13.61 U$3.13 | v6.07,18.26 6.1,18.26 6.28,18.08 R23.2 5.82,17.11 3.6,17.11 R24.1 3.1,17.61
  Route15 0.152: v12.2,14.71 12.2,14.73 12.09,14.83 9.78,14.83 8.89,13.94 8.89,11.63 8.56,11.3 6.49,11.3 6.19,11.6 5.6,12.19 4.64,12.19 4.39,12.44 4.39,13.95 5.21,14.76 5.21,17.4 v6.07,18.26
N$48  (via drill 0.2 pad 0.41)
  Top 0.152: U4.3 31.62,13.97 v31.7,13.89 | 29.33,13.84 29.33,14.25
  Top 0.203: R7.2 29.33,14.25 C5.1 29.33,14.23 29.33,13.84 29.33,13.58 v29.31,13.56 29.33,13.56
  Route15 0.152: v31.7,13.89 31.65,13.89 31.22,13.46 29.41,13.46 v29.31,13.56
N$49  (via drill 0.2 pad 0.41)
  Top 0.152: C6.1 29.33,17.34 R54.2 | U4.2 31.12,13.98 v31.04,13.89
  Top 0.203: C6.1 29.32,17.9 v29.16,18.06
  Route15 0.152: v31.04,13.89 32.13,14.99 32.13,16.64 31.69,17.08 30.07,17.08 29.16,17.99 v29.16,18.06
OTG  (via drill 0.2 pad 0.41)
  Top 0.152: v27.69,13.61 v27.68,13.61 27.68,13.53 27.55,13.4 U1.8
  Top 0.203: R3.2 27.25,16.46 27.3,16.46 v27.56,16.21
  Route15 0.152: v27.69,13.61 27.74,13.66 27.74,16.03 v27.56,16.21
PG  (via drill 0.2 pad 0.41)
  Top 0.152: v11.66,14.4 11.74,14.4 U$3.14
  Top 0.508: J1.@12 J1.12
  Route15 0.152: J1.@12 4.83,14.93 4.04,14.14 4.04,12.26 4.46,11.84 5.46,11.84 6.37,10.92 8.71,10.92 9.26,11.47 9.26,13.61 10.05,14.4 v11.66,14.4
  Bottom 0.152: J1.12 4.83,22.27 | J1.12 4.83,21.72 | J1.12 5.28,21.13
REGN  (via drill 0.2 pad 0.41)
  Top 0.152: U1.22 27.05,8.23 26.8,7.97 | 26.8,7.97 26.54,7.71 26.54,6.95 26.14,6.56 C37.1 25.95,6.49 v26.31,6.13 | 26.8,7.97
  Top 0.508: J2.@7 J2.7
  Route15 0.152: v26.31,6.13 26.11,6.13 25.3,5.32 20.48,5.32 19.94,4.78 19.94,1.45 J2.7
SCL  (via drill 0.2 pad 0.41)
  Top 0.152: U1.5 28.83,11.52 v30.1,11.52 30.4,11.52 30.8,11.12 R30.2 | U4.7 31.12,18.13 v30.99,18.26 | J1.@2 30.4,22.69 30.4,21.02 29.99,21.02
  Route15 0.152: v30.1,11.52 32.13,11.52 33.34,12.73 33.34,17.81 32.88,18.27 v30.99,18.27 v30.99,18.26 30.99,20.3 30.23,21.05 J1.2 J1.@2
  Bottom 0.152: J1.@2 30.25,22.84 30.25,21.26
  Bottom 0.203: 30.25,21.26 30.25,22.25
SDA  (via drill 0.2 pad 0.41)
  Top 0.152: v30.23,18.24 30.62,17.84 U4.8
  Top 0.203: U1.6 v29.72,12.07 30.78,12.07 R36.2
  Top 0.508: J1.@3 J1.3
  Route15 0.152: 27.69,22.27 J1.3 27.69,21.23 30.23,18.69 v30.23,18.24 30.23,18.21 30.61,17.83 32.77,17.83 32.97,17.63 32.97,13.01 32.03,12.07 v29.72,12.07
  Bottom 0.152: J1.@3 J1.3
SW1
  Top 0.152: U1.20 26.05,8.38 26.02,8.34 25.55,8.34 U1.19 24.93,8.23 C2.2 | L7.P$1 22.24,5.7
  Top 0.305: 22.7,5.7 L7.P$1
  pour Top (no thermals): 24.16,9.19 26.09,9.19 arc-90 26.21,9.07 26.21,8.46 arc-90 25.96,8.2 25.37,8.2 arc90 25.25,8.08 25.25,5.56 arc-90 24.59,4.9 20.57,4.9 arc-90 20.42,5.05 20.42,6.73 arc-90 20.55,6.86 23.65,6.86 arc90 23.77,6.99 23.77,8.81 arc-90
TS  (via drill 0.2 pad 0.41)
  Top 0.152: R1.2 25.84,17.8 v25.62,17.8 | U1.11 26.05,13.63 v26.14,13.72
  Top 0.203: 26.05,12.89 U1.11
  Top 0.508: J1.@5 J1.5
  Route15 0.152: J1.5 22.61,21.54 23.88,20.27 24.79,20.27 25.58,19.48 25.58,17.86 v25.63,17.81 | v25.62,17.8 v25.63,17.81 | v25.63,17.81 25.81,17.63 27.86,17.63 28.38,17.11 28.38,16.01 28.22,15.85 28.22,13.39 28.02,13.18 26.67,13.18 v26.14,13.72
VBAT  (via drill 0.2 pad 0.41)
  Top 0.203: R54.1 v27.93,16.78
  Top 0.305: 24.77,17.65 24.52,17.32 C3.1 | 24.02,15.31 C73.1 24.02,15.21 C72.1
  Top 0.508: J1.@6 J1.6 | J1.@7 J1.7 | J1.@8 J1.8
  Top 1.524: 14.99,19.56 J1.8 J1.7 | J1.7 17.53,19.3 | 20.07,19.56 J1.6 J1.7
  Route15 0.152: v27.93,16.78 27.46,17.25 24.99,17.25 24.89,17.35 24.89,17.88 | 24.89,18.26 24.89,17.98 | 24.89,17.98 24.89,17.88 | 24.89,17.98 24.89,18.32 | 24.89,17.88 24.46,18.32 v24.38,18.32
  Bottom 0.152: J1.8 J1.7 17.65,21.59 J1.6
  Bottom 1.524: 17.65,21.59 J1.8 v14.99,19.33 v14.98,19.33 | v17.52,19.84 v17.53,19.84 J1.7 J1.6 v20.06,19.33
  other vias: 24,13.62 24,13.11 24,12.6 24,12.09 24.51,13.62 24.51,13.11 25.02,12.6 24.51,12.6 24.64,14.25 24.64,14.89 24.64,15.52 24.38,16.16 23.87,16.16 23.87,18.32 23.87,17.55 23.87,16.92 14.48,19.84 15.49,19.84 16.51,19.84 18.54,19.84 19.56,19.84 20.57,19.84 21.59,19.84 22.6,19.84 23.62,19.84 14.48,18.82 15.49,18.82 16.51,18.82 17.52,18.82 18.54,18.82 19.56,18.82 20.57,18.82 21.59,18.82 22.6,18.82 23.62,18.82 24.64,18.82 16,19.33 17.02,19.33 18.03,19.33 19.05,19.33 21.08,19.33 22.1,19.33 23.11,19.33 24.13,19.33 25.02,13.62 25.02,13.11 25.02,16.16 25.02,15.22 25.02,14.58
  pour Top (no thermals): 24.08,11.51 arc-90 23.62,11.96 23.62,18.14 arc90 23.19,18.57 14.81,18.57 arc-90 14.05,19.33 14.05,22.76 arc-90 14.17,22.89 14.3,22.89 arc90 14.33,22.86 19.91,22.86 arc-90 19.94,22.89 20.8,22.89 arc-90 21.03,22.66 21.03,20.47 arc90 21.39,20.12 24.89,20.12 arc-90 25.17,19.84 25.17,11.51
  pour Route15 (no thermals): 14.22,22.86 14.22,18.8 arc90 14.48,18.54 22.86,18.54 23.24,18.54 arc-90 23.62,18.16 23.62,11.81 arc90 23.88,11.56 25.02,11.56 25.15,11.56 arc90 25.27,11.68 25.27,19.94 arc90 25.02,20.19 20.95,20.19 arc-90 20.83,20.32 20.83,22.86
  pour Route2 (no thermals): 14.22,22.86 14.22,18.8 arc90 14.48,18.54 23.24,18.54 arc-90 23.62,18.16 23.62,11.68 arc90 23.75,11.56 25.15,11.56 arc90 25.27,11.68 25.27,20.07 arc90 25.15,20.19 20.95,20.19 arc-90 20.83,20.32 20.83,22.86
  pour Bottom (no thermals): 24.71,20.24 14.3,20.24 arc90 14.17,20.12 14.17,18.72 arc90 14.4,18.49 23.22,18.49 arc-90 23.55,18.16 23.55,12.29 arc90 24,11.84 24.59,11.84 arc90 25.3,12.55 25.3,19.66 arc90
VCC  (via drill 0.2 pad 0.41)
  Top 0.152: C30.1 14.1,5.93 v14.1,5.33 | 14.22,9.4 v14.17,9.34 C31.1
  Top 0.203: 13.54,10.05 13.74,9.85 U$3.5 | 13.54,10.05 13.24,10.35 U$3.4 | 13.54,10.05 13.54,9.59 13.54,9.6 C31.1 C32.1 C35.1 13.54,6.69 14.06,6.17 C30.1 | 14.61,6.13 15.21,6.13 15.24,6.1 15.37,6.1 C102.P$1 | J2.@6 17.58,0.61 | 17.58,0.61 J2.6 | 17.53,1.68 17.53,1.52 17.53,0.67 17.58,0.61
  Top 0.305: C28.2 R4.2 10.46,5.71 v10.43,5.73
  Top 0.508: J2.5 15.16,1.14 15.16,0.13 J2.@5 | J2.@6 17.63,0.05 17.63,1.42 17.53,1.52
  Top 1: v14.1,5.33 13.6,5.33 13.6,3.26 14.59,2.27
  Top 1.016: J2.@5 15.04,1.09 15.2,1.25
  Top 1.524: C102.P$1 13.86,4.59 13.86,3.7 | J2.5 15.04,3.2 | 15.04,3.2 15.04,4.9 15.04,4.91 | J2.6 17.58,2.59 16.99,3.18 | 16.99,3.18 16.21,3.96 | 16.99,3.18 15.06,3.18 15.04,3.2
  Top 2.032: C102.P$1 16,5.87 | 16.21,3.96 16.21,6.07 16,5.87 | 15.04,4.91 16,5.87
  Route15 0.305: v10.43,5.73 10.68,5.98 13.45,5.98 v14.1,5.33
  Bottom 0.508: J2.@6 17.58,1.19 | 17.58,1.19 J2.6 | J2.@5 J2.5 | 17.5,1.27 17.58,1.19
  Bottom 1.524: 17.5,1.27 J2.5 14.86,1.45 v14.86,4.32 | 17.58,2.79 J2.6
  other vias: 14.17,8.58 14.17,7.82 14.17,7.06 13.41,5.33 14.6,8.96 14.6,8.2 14.6,7.44 15.36,8.2 16.12,8.2 16.88,8.2 14.6,6.67 14.6,5.91 14.86,5.33 15.88,5.33 16.89,5.33 13.76,4.83 14.52,4.83 15.28,4.83 16.3,4.83 17.06,4.83 14.1,4.32 15.62,4.32 16.64,4.32 13.76,3.81 14.52,3.81 15.28,3.81 16.05,3.81 17.06,3.81 14.1,3.3 14.86,3.3 15.62,3.3 16.38,3.3 14.52,2.79 15.28,2.79 16.05,2.79 17.06,2.79 17.82,2.79
  pour Top (no thermals): 13.13,11.05 13.79,11.05 13.79,10.36 arc90 14.45,9.7 15.06,9.7 arc-90 15.21,9.55 15.21,8.81 arc90 15.39,8.64 16.94,8.64 arc-90 17.25,8.33 17.25,4.83 arc-90 16.56,4.14 14.02,4.14 arc-90 13.13,10.16
  pour Route2 (no thermals): 13.46,9.91 14.35,9.91 arc-90 14.48,9.78 arc90 14.61,9.65 15.11,9.65 arc-90 15.37,9.4 15.37,8.89 arc90 15.62,8.64 16.89,8.64 17.02,8.64 arc-90 17.27,8.38 17.27,4.06 arc90 17.78,3.56 18.03,3.56 arc-90 18.54,3.05 18.54,0.51 14.22,0.51 14.22,2.03 14.22,2.29 arc90 13.72,2.79 13.59,2.79 arc-90 13.21,3.17 13.21,9.53 13.21,9.65 arc-90
  pour Route15: 13.97,9.91 14.35,9.91 arc-90 14.48,9.78 arc90 14.61,9.65 15.11,9.65 arc-90 15.37,9.4 15.37,8.89 arc90 15.62,8.64 15.75,8.64 16.89,8.64 17.02,8.64 arc-90 17.27,8.38 17.27,4.06 arc90 17.78,3.56 18.16,3.56 18.29,3.56 arc-90 18.54,3.3 18.54,0.51 14.22,0.51 14.22,2.16 14.22,2.29 arc90 13.72,2.79 13.59,2.79 arc-90 13.21,3.17 13.21,9.4 13.21,9.65 arc-90 13.46,9.91
  pour Bottom (no thermals): 13.51,9.93 14.33,9.93 14.38,9.93 arc-90 14.5,9.8 14.5,9.78 arc90 14.63,9.65 15.16,9.65 arc-90 15.37,9.45 15.37,9.35 15.37,8.92 15.37,8.89 arc90 15.57,8.69 16.99,8.69 arc-90 17.3,8.38 17.3,4.11 arc90 17.83,3.58 18.34,3.58 arc-90 18.57,3.35 18.57,2.62 arc90 18.62,2.57 14.25,2.57 arc90 14.22,2.54 14.22,2.77 arc90 14.1,2.9 13.46,2.9 arc-90 13.21,3.15 13.21,9.65 arc-90 13.49,9.93
VIN  (via drill 0.2 pad 0.41)
  Top 0.152: C10.2 30.41,10.05 29.93,9.57 U1.1 | C57.1 30.39,4.59 v30.38,4.57
  Top 0.203: U1.24 28.05,8.82 30.6,8.82 | 30.37,8.59 30.38,8.59
  Top 0.508: J2.@11 J2.11 | J2.@12 J2.12
  Top 1.016: J2.11 30.38,1.37 30.38,2.64 30.38,3.86 | 30.38,8.59 v30.38,4.57 30.38,3.86 | 31.19,3.86 30.38,3.86
  Top 1.524: J2.12 32.82,2.08 32.23,2.66 | 31.19,3.86 31.19,3.7 32.23,2.66 | 30.38,2.64 30.39,2.66 32.23,2.66
  Top 1.778: 30.28,5.36 J2.11
  Bottom 1.524: J2.12 J2.11 30.28,3.45 v30.38,3.56 | v31.9,3.56 32.21,3.25 32.21,1.27
  other vias: 29.62,4.57 31.14,4.57 29.97,4.06 30.73,4.06 31.5,4.06 32.26,4.06 29.62,3.56 31.14,3.56 32.66,3.56 29.97,3.05 30.73,3.05 31.5,3.05 32.26,3.05 29.62,5.33 29.62,6.1 29.62,6.86 29.62,7.62 29.62,8.38 30.12,8.38 30.12,7.62 29.62,9.14 30.12,9.14 28.85,8.38
  pour Top (no thermals): 28.55,9.68 30.15,9.68 arc90 30.25,9.78 30.25,10.24 arc-90 30.38,10.36 31.06,10.36 arc-90 31.09,10.34 31.09,5.03 arc90 31.47,4.65 32.33,4.65 arc-90 32.89,4.09 32.89,2.97 arc-90 32.82,2.9 29.57,2.9 arc-90 29.26,3.2 29.26,7.87 arc90 29.08,8.05 28.09,8.05 arc-90 27.94,8.2 27.94,9.19 28.45,9.19 arc90 28.55,9.3
  pour Route15 (no thermals): 29.21,9.65 29.97,9.65 arc90 30.35,10.03 30.35,10.16 arc-90 30.61,10.41 30.86,10.41 arc-90 31.11,10.16 31.11,4.95 arc90 31.37,4.7 32.26,4.7 arc-90 32.89,4.06 32.89,3.43 32.89,3.05 arc90 33.02,2.92 arc-90 33.66,2.29 33.66,0 29.46,0 29.46,2.16 29.46,2.67 arc90 29.34,2.79 arc-90 29.21,2.92 29.21,3.43 29.21,7.62 29.21,7.87 arc90 29.08,8 28.32,8 28.19,8 arc-90 27.94,8.26 27.94,9.02 arc-90 28.07,9.14 28.45,9.14 arc90 28.57,9.27 28.57,9.53 arc-90 28.7,9.65
  pour Route2 (no thermals): 30.73,10.41 30.86,10.41 arc-90 31.11,10.16 31.11,4.95 arc90 31.37,4.7 32.38,4.7 arc-90 32.89,4.19 32.89,3.17 arc90 33.15,2.92 33.27,2.92 arc-90 33.66,2.54 33.66,0.51 29.46,0.51 29.46,2.67 arc90 29.34,2.79 arc-90 29.21,2.92 29.21,7.62 29.21,7.87 arc90 29.08,8 28.07,8 arc-90 27.94,8.13 27.94,8.76 27.94,9.02 arc-90 28.07,9.14 28.45,9.14 arc90 28.57,9.27 28.57,9.53 arc-90 28.7,9.65 28.83,9.65 29.97,9.65 30.1,9.65 arc90 30.35,9.91 30.35,10.29 arc-90 30.48,10.41
  pour Bottom (no thermals): 28.73,9.63 30.81,9.63 arc-90 31.11,9.32 31.11,5 arc90 31.39,4.72 32.26,4.72 arc-90 32.92,4.06 32.92,2.57 arc-90 32.89,2.54 29.44,2.54 arc-90 29.18,2.79 29.18,7.8 arc90 29.01,7.98 28.63,7.98 arc-90 28.5,8.1 28.5,9.4 arc-90
VSYS  (via drill 0.2 pad 0.41)
  Top 0.152: 22.3,9 22.1,9 L7.P$2 | 6.25,16.61 R23.1 | 6.43,16.43 6.25,16.61 | 8.33,16.2 8.16,16.04 C12.1 | 13.24,13.97 U$3.11 U$3.10 | R16.1 5.37,16.61 6.25,16.61 | 6.57,12.01 6.75,11.83 6.75,11.61 6.57,11.79 | 6.57,11.61 6.57,11.79 | 6.57,11.79 6.57,12.01 | v6.51,12.07 6.57,12.01 | U6.A1
  Top 0.203: L7.P$2 21.48,9.37 | 13.24,13.91 U$3.11 | U6.A1 6.75,11.61
  Top 0.305: 22.28,9.18 22.1,9 | 19.96,14.66 C100.P$1 | R23.1 5.37,16.61 | R14.1 R16.1
  other vias: 15.93,15.63 14.38,15.63 15.15,15.63 13.62,15.63 12.86,15.63 7.01,14.69 7.01,14.11 7.55,14.11 7.55,14.69 7.57,15.25 8.13,15.25 13.64,14.87 14.41,14.87 15.17,14.87 15.93,14.87 16.69,14.87 17.45,14.87 18.22,14.87 21.52,10.8 22.28,10.8 23.04,10.8 22.53,10.3 21.77,10.3 12.04,15.65 11.26,15.65 10.57,15.68 9.96,15.68 9.25,15.68 18.47,15.63 19.99,13.6 20.76,13.6 20.76,12.84 20.76,12.07 20.76,11.31 20.76,10.55 23.8,10.8 21.54,15.53 21.54,14.77 21.54,14 21.87,15.15 21.87,14.41 19.99,12.84 19.99,12.07 19.99,11.31 19.99,10.55 20.25,9.79 20.25,9.03 20.25,8.26 7.01,13.6 7.01,13.09 7.01,12.58 7.52,13.6 7.52,13.09 7.52,12.58 6.51,12.58 7.01,15.2 7.01,15.71 7.01,16.21
  pour Top (no thermals): 13.47,12.49 arc90 13.57,12.38 14.18,12.38
  pour Route15: 22.15,21.67 arc90 21.77,22.05
  pour Bottom: 6.91,16.79 20.5,16.79 arc-90 20.95,16.33 20.95,15.77 arc90 21.16,15.57 21.62,15.57 arc-90 22.02,15.16 22.02,11.66 arc90 22.53,11.15 23.19,11.15 arc-90 23.22,11.13 arc-90 23.39,10.95 23.39,8.81 arc-90 22.43,7.85 20.27,7.85 arc-90 19.81,8.31 19.81,13.36 arc90 18.92,14.25 13.36,14.25 arc-90 13.16,14.45 13.16,14.76 arc90 12.73,15.19 8.84,15.19 arc90 7.85,14.2 7.85,13.21 arc-90 6.53,11.89 arc-90 6.07,12.34 6.07,15.95 arc-90
  pour Route15: 18.03,16.76 6.35,16.76 arc90 6.1,16.51 6.1,11.94 arc90 6.35,11.68 6.6,11.68 arc90 6.86,11.94 6.86,12.19 arc-90 7.11,12.45 7.62,12.45 arc90 7.87,12.7 7.87,14.48 arc-90 8.64,15.24 12.83,15.24 arc-90 13.08,14.99 13.08,14.48 arc90 13.34,14.22 19.05,14.22 arc-90 19.81,13.46 19.81,8.31 arc90 20.24,7.87 22.61,7.87 arc90 23.37,8.64 23.37,10.16 arc-90 23.62,10.41 24.13,10.41 arc90 24.38,10.67 24.38,10.92 arc90 24.13,11.18 22.35,11.18 arc-90 22.1,11.43 22.1,15.49 arc90 21.84,15.75 18.54,15.75 arc-90 18.29,16 18.29,16.51 arc90
  pour Route2: 6.35,16.76 18.03,16.76 arc-90 18.29,16.51 18.29,16 arc90 18.41,15.88 21.72,15.88 arc-90 22.1,15.49 22.1,11.43 arc90 22.35,11.18 24.26,11.18 arc-90 24.38,11.05 24.38,10.54 arc-90 24.26,10.41 23.75,10.41 arc90 23.37,10.03 23.37,8.51 arc-90 22.73,7.87 20.45,7.87 arc-90 19.81,8.51 19.81,13.59 arc90 19.18,14.22 13.59,14.22 arc-90 13.08,14.73 arc90 12.57,15.24 8.64,15.24 arc90 7.87,14.48 7.87,12.52 arc-90 7.67,12.32 7.19,12.34 arc90 6.91,12.06 6.91,11.86 arc-90 6.73,11.68 6.22,11.68 arc-90 6.1,11.81 6.1,16.51 arc-90
  pour Top (no thermals): 6.1,16.51 6.1,11.66 arc90 6.2,11.56 6.65,11.56 arc90 6.86,11.76 6.86,12.06 arc-90 7.11,12.32 7.75,12.32 arc90 7.87,12.45 7.87,14.48 arc-90 8.64,15.24 12.7,15.24 arc-90 13.08,14.86 13.08,13.21 13.84,13.21 13.84,14.1 arc-90 13.97,14.22 19.02,14.22 arc-90 19.81,13.44 19.81,8.26 arc90 20.19,7.87 22.99,7.87 arc90 23.37,8.26 23.37,10.29 arc-90 23.5,10.41 25.27,10.41 25.27,11.18 22.35,11.18 arc-90 22.1,11.43 22.1,15.49 arc90 21.72,15.88 18.41,15.88 arc-90 18.29,16 18.29,16.51 arc90 18.03,16.76 6.35,16.76 arc90

## Text on the board
Top: T1
Route2: G2
Route15: P3
Bottom: B4
tPlace: 1
bPlace: EN | PG | RST | GND | GND | VBAT | VBAT | VBAT | TS | !INT | SDA | SCL | CHG | ELEKTRA-PMIC v0.2 | 20240309 | 3V3 | 3V3 | 5VDC | 5VDC | VCC | VCC | REGN | GND | GND | VIN | VIN | NC
Reference: 40*27mm
tDocu: NR3015T2R2M